# Altium PCB Glove_V2.PcbDoc
Units mil, origin at the board's own origin, x right, y up, seen from the top; angles counter-clockwise.
Board outline 3750 x 2225 mil, 2 copper layers (Top Layer, Bottom Layer); 12 components, 14 nets, 60 pads, 0 vias.
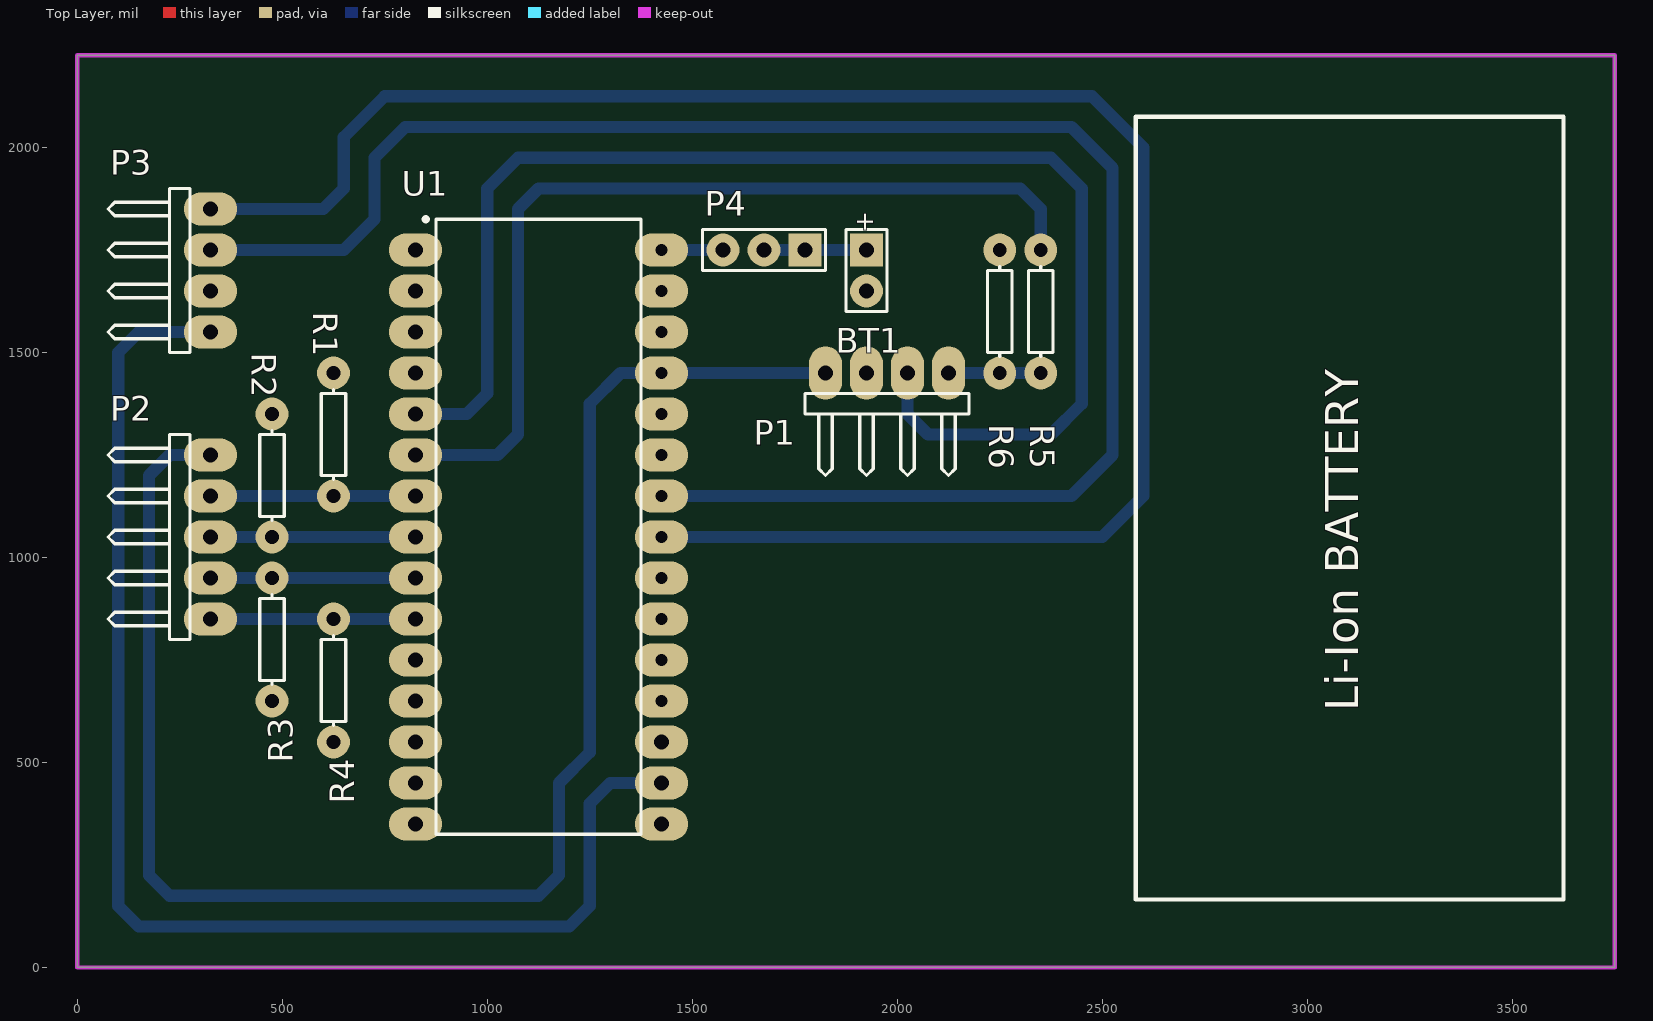
[diagram p0: Top Layer view]
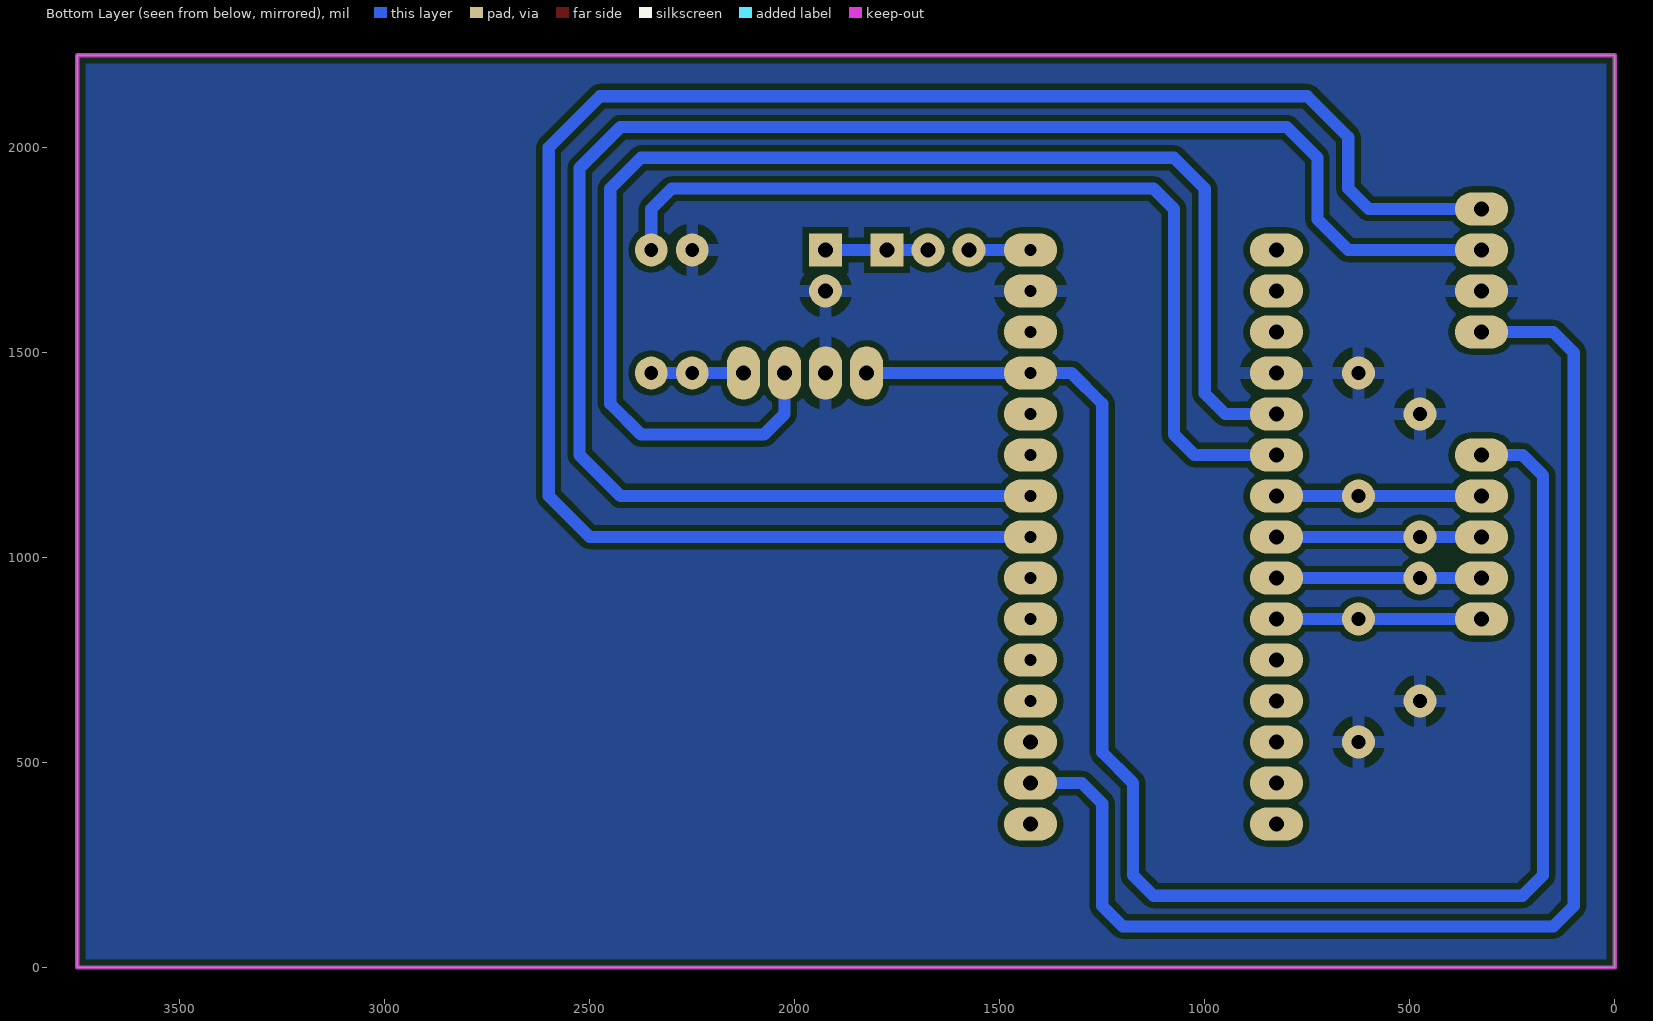
[diagram p1: Bottom Layer view, seen from below]

## Layer stack, top to bottom
Top Solder: solder mask 0.4, Solder Resist, Dk 3.5
Top Layer: signal copper 1.4
Dielectric 1: dielectric 12.6, FR-4, Dk 4.8
Bottom Layer: signal copper 1.4
Bottom Solder: solder mask 0.4, Solder Resist, Dk 3.5

## Board outline
0,0 3750,0 3750,2225 0,2225

## Design rules (kind name [scope] priority, off if disabled: settings)
Clearance [All] p1: gap=15 ignorepadtopadclearanceinfootprint=FALSE
PlaneClearance [All] p1: clearance=25
PlaneConnect [All] p1: planeconnectstyle=Relief reliefexpansion=25 reliefentries=4 reliefconductorwidth=30 reliefairgap=25
PolygonConnect [All] p1: connectstyle=Relief reliefconductorwidth=30 reliefentries=4 polygonreliefangle="90 Angle" airgapwidth=25
RoutingVias [All] p1: holewidth=28 width=50 viastyle="Through Hole" minholewidth=28 minwidth=50 maxholewidth=28 maxwidth=50
SolderMaskExpansion [All] p1: expansion=4
Width [All] p1: maxlimit=30 minlimit=30 preferedwidth=30 minimp=50.000000 maximp=50.000000 favimp=50.000000
28 further rules are at their usual default settings.

## Components (designator, comment, footprint, x,y, rotation, side; value= is the part's Value field where it differs from the comment)
BT1 "Battery" BAT-2 1925,1700 r270 top
P1 "BT" HDR1X4H 1825,1450 r0 top
P2 "Buttons" HDR1X5H 325,1250 r270 top
P3 "Gyro" HDR1X4H 325,1850 r270 top
P4 "Poewr_SW" HDR1X3 1775,1750 r180 top
R1 "Res1" AXIAL-0.3 625,1300 r270 top value=1K
R2 "Res1" AXIAL-0.3 475,1200 r270 top value=1K
R3 "Res1" AXIAL-0.3 475,800 r90 top value=1K
R4 "Res1" AXIAL-0.3 625,700 r90 top value=1K
R5 "Res1" AXIAL-0.3 2350,1600 r270 top value=1K
R6 "Res1" AXIAL-0.3 2250,1600 r270 top value=2K
U1 "Arduino Nano" Arduino_Nano 975,1350 r0 top

## Footprints (in the part's own frame and the unit in brackets; to place one, negate y for a bottom-side part, rotate by r counter-clockwise, add the part's x,y. Pads: shape width x height; smd on the part's side, far side on the other; paste and mask are expansions set on the pad)
Arduino_Nano [mil] "DIP; 30 Leads"
  oval 130x80 hole 35.43: 1(-150,400) 2(-150,300) 3(-150,200) 4(-150,100) 5(-150,0) 6(-150,-100) 7(-150,-200) 8(-150,-300) 9(-150,-400) 10(-150,-500) 11(-150,-600) 12(-150,-700) 13(-150,-800) 14(-150,-900) 15(-150,-1000) 16(450,-1000) 17(450,-900) 18(450,-800)
  oval 130x80 hole 30: 19(450,-700) 20(450,-600) 21(450,-500) 22(450,-400) 23(450,-300) 24(450,-200) 25(450,-100) 26(450,0) 27(450,100) 28(450,200) 29(450,300) 30(450,400)
  silkscreen extent -130,-1025 400,480, body extent -150,-1050 450,500, height 200
AXIAL-0.3 [mil] "Axial Device, Thru-Hole; 2 Leads; 0.3 in Pin Spacing"
  round 80 hole 33.46: 1(-150,0) 2(150,0)
  silkscreen extent -109,-30 109,30
BAT-2 [mil] "Battery; 2 Leads"
  rect 80x80 hole 35.43: 1(-50,0)
  round 80 hole 35.43: 2(50,0)
  silkscreen extent -100,-50 100,50
HDR1X3 [mil] "Connector; Header; 3 Position"
  rect 80x80 hole 35.43: 1(0,0)
  round 80 hole 35.43: 2(100,0) 3(200,0)
  silkscreen extent -50,-50 250,50
HDR1X4H [mil] "Connector; Header; 4 Position; Right Angle"
  oval 80x130 hole 35.43: 1(0,0) 2(100,0) 3(200,0) 4(300,0)
  silkscreen extent -50,-250 350,-50
HDR1X5H [mil] "Connector; Header; 5 Position; Right Angle"
  oval 80x130 hole 35.43: 1(0,0) 2(100,0) 3(200,0) 4(300,0) 5(400,0)
  silkscreen extent -50,-250 450,-50

## Part data
BT1: "Multicell Battery", LatestRevisionDate=17-Jul-2002, LatestRevisionNote="Re-released for DXP Platform.", PackageDescription="Battery; 2 Leads", PackageReference=BAT-2, Published=24-Mar-1999, Publisher="Altium Limited"
P1 P3: library part "Header 4H", "Header, 4-Pin, Right Angle", LatestRevisionDate=17-Jul-2002, LatestRevisionNote="Re-released for DXP Platform.", Publisher="Altium Limited"
P2: library part "Header 5H", "Header, 5-Pin, Right Angle", LatestRevisionDate=17-Jul-2002, LatestRevisionNote="Re-released for DXP Platform.", Publisher="Altium Limited"
P4: library part "Header 3", "Header, 3-Pin", LatestRevisionDate=17-Jul-2002, LatestRevisionNote="Re-released for DXP Platform.", Publisher="Altium Limited"
R1 R2 R3 R4 R5 R6: "Resistor", LatestRevisionDate=17-Jul-2002, LatestRevisionNote="Re-released for DXP Platform.", PackageDescription="Axial Device, Thru-Hole; 2 Leads; 0.3 in Pin Spacing", PackageReference=AXIAL-0.3, Published=8-Jun-2000, Publisher="Altium Limited"

## Nets (pads, with @x,y where several pads share a name; then routed paths per layer and width w, separated by ;. In a path a pad name is that pad's centre, name@x,y a point inside that pad or via, vN(x,y) a via of type N, cw(c..) or ccw(c..) an arc to the next point about the centre after c; other vN are vias at no path point)
3V3: P3.4 U1.17 | length 3232.8
  Bottom Layer w30: P3.4 150,1550 100,1500 100,150 150,100 1200,100 1250,150 1250,400 1300,450 U1.17
+5: P1.1 P2.1 U1.27 | length 3974.3
  Bottom Layer w30: P2.1 225,1250 175,1200 175,225 225,175 1125,175 1175,225 1175,450 1250,525 1250,1375 1325,1450 U1.27 P1.1
GND: BT1.2 P1.2 P3.3 R1.1 R2.1 R3.1 R4.1 R6.1 U1.4 U1.29
NetBT1_1: BT1.1 P4.1 P4.2 | length 250
  Bottom Layer w30: P4.2 P4.1 BT1.1
NetP1_3: P1.3 U1.5 | length 3309.6
  Bottom Layer w30: U1.5 950,1350 1000,1400 1000,1900 1075,1975 2375,1975 2450,1900 2450,1375 2375,1300 2075,1300 2025,1350 P1.3
NetP1_4: P1.4 R5.2 R6.2 | length 225
  Bottom Layer w30: P1.4 R6.2 R5.2
NetP2_2: P2.2 R1.2 U1.7 | length 500
  Bottom Layer w30: P2.2 R1.2 U1.7
NetP2_3: P2.3 R2.2 U1.8 | length 500
  Bottom Layer w30: P2.3 R2.2 U1.8
NetP2_4: P2.4 R3.2 U1.9 | length 500
  Bottom Layer w30: P2.4 R3.2 U1.9
NetP2_5: P2.5 R4.2 U1.10 | length 500
  Bottom Layer w30: P2.5 R4.2 U1.10
NetP3_1: P3.1 U1.23 | length 4580.3
  Bottom Layer w30: P3.1 600,1850 650,1900 650,2025 750,2125 2475,2125 2600,2000 2600,1150 2500,1050 U1.23
NetP3_2: P3.2 U1.24 | length 4295
  Bottom Layer w30: P3.2 650,1750 725,1825 725,1975 800,2050 2425,2050 2525,1950 2525,1250 2425,1150 U1.24
NetR5_1: R5.1 U1.6 | length 2237.1
  Bottom Layer w30: U1.6 1025,1250 1075,1300 1075,1850 1125,1900 2300,1900 2350,1850 R5.1
VIN: P4.3 U1.30 | length 150
  Bottom Layer w30: U1.30 P4.3
pads on no net: U1.1 U1.2 U1.3 U1.11 U1.12 U1.13 U1.14 U1.15 U1.16 U1.18 U1.19 U1.20 U1.21 U1.22 U1.25 U1.26 U1.28

## Polygon pours and split planes (outlines as drawn)
GND on Bottom Layer "Bottom Layer-GND" (solid, pour order 4): 0,0 0,2225 3750,2225 3750,0

## Keep-outs
Keep-Out Layer:
  the board outline again, w10

## Silkscreen, mask and mechanical layers (free items; w line width, h text height)
Top Overlay:
  lines w10: 2581.69,165.55 3625,165.55 3625,2075 2581.69,2075 2581.69,165.55
  text "Li-Ion BATTERY" at 3125,625 h80 r90

## Text inside footprints (layer, text, board x,y; h text height)
BT1: Top Overlay "+" at 1902.28,1844.49 h45.28 r270